# EAGLE board in4_mount (EAGLE 7.5.0)
CIRCULAR-LAYOUT-SETTINGS: 0.650000 0.700000 0.552268 8.000000 0 0 0
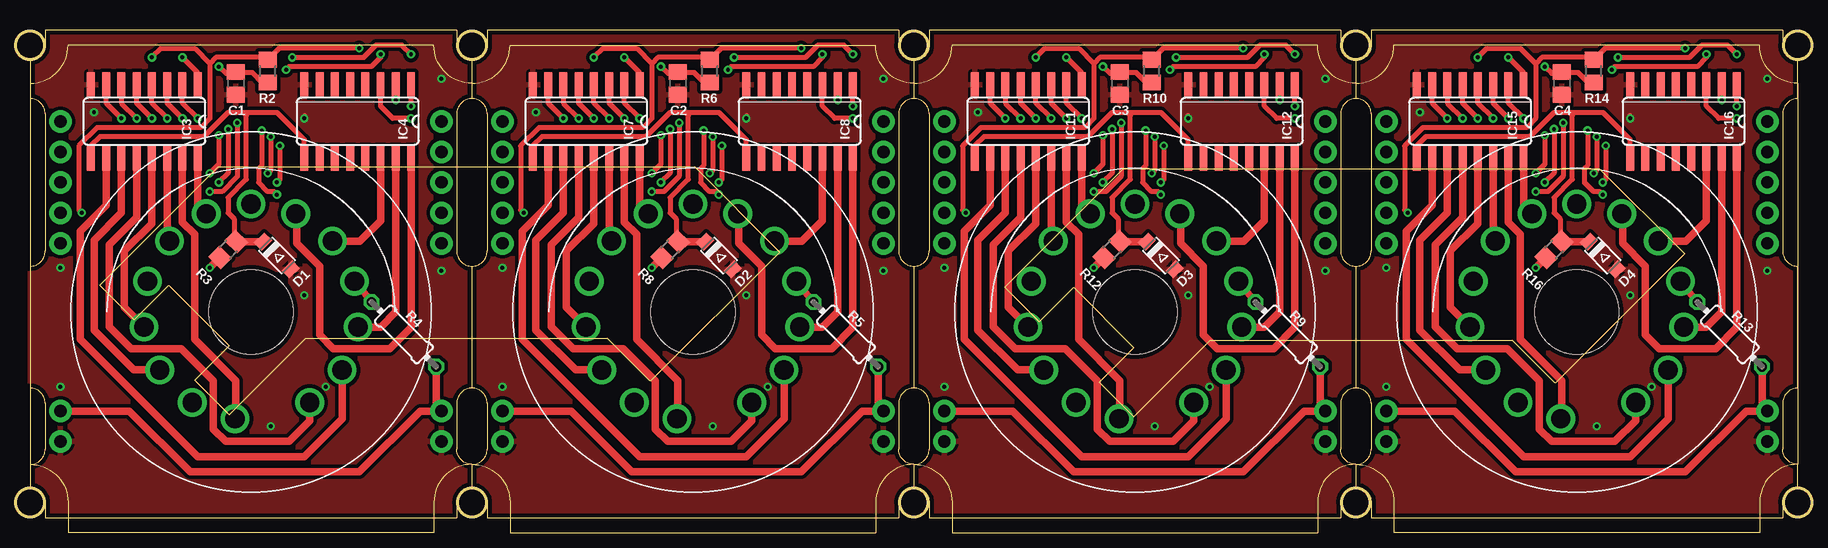
[diagram p0: board, top side]
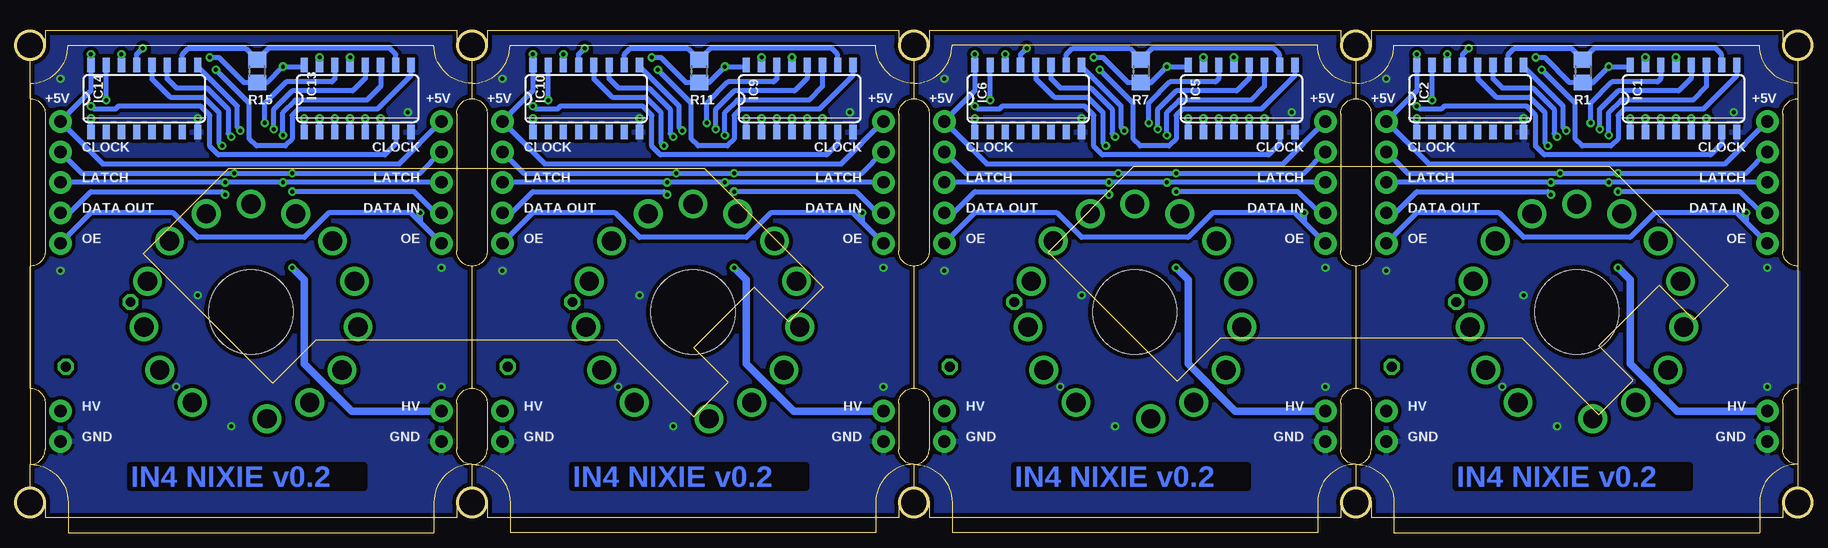
[diagram p1: board, bottom side, seen from below]

Size 147.32 x 40.64 mm. Coordinates in mm from the lower left corner, seen from the top.
Outline: 36.83,2.54 arc90 35.56,1.27 35.56,0 1.27,0 1.27,1.27 arc90 0,2.54 0,4.45 arc90 1.27,5.71 1.27,9.52 arc90 0,10.8
Outline: 36.83,38.1 arc-90 35.56,39.37 35.56,40.64 1.27,40.64 1.27,39.37 arc-90 0,38.1 0,34.92 arc-90 1.27,33.66 1.27,22.23 arc-90 0,20.95
Outline: 36.83,20.95 arc-90 35.56,22.23 35.56,33.66 arc-90 36.83,34.92
Outline: 36.83,4.45 arc-90 35.56,5.71 35.56,9.52 arc-90 36.83,10.8
Outline: 36.83,38.1 36.83,34.92
Outline: 36.83,20.95 36.83,10.8
Outline: 36.83,4.45 36.83,2.54
Outline: 73.66,2.54 arc90 72.39,1.27 72.39,0 38.1,0 38.1,1.27 arc90 36.83,2.54
Outline: 73.66,38.1 arc-90 72.39,39.37 72.39,40.64 38.1,40.64 38.1,39.37 arc-90 36.83,38.1
Outline: 36.83,20.95 arc90 38.1,22.23 38.1,33.66 arc90 36.83,34.92
Outline: 73.66,20.95 arc-90 72.39,22.23 72.39,33.66 arc-90 73.66,34.92
Outline: 36.83,4.45 arc90 38.1,5.71 38.1,9.52 arc90 36.83,10.8
Outline: 73.66,4.45 arc-90 72.39,5.71 72.39,9.52 arc-90 73.66,10.8
Outline: 73.66,38.1 73.66,34.92
Outline: 73.66,20.95 73.66,10.8
Outline: 73.66,4.45 73.66,2.54
Outline: 110.49,2.54 arc90 109.22,1.27 109.22,0 74.93,0 74.93,1.27 arc90 73.66,2.54
Outline: 110.49,38.1 arc-90 109.22,39.37 109.22,40.64 74.93,40.64 74.93,39.37 arc-90 73.66,38.1
Outline: 73.66,20.95 arc90 74.93,22.23 74.93,33.66 arc90 73.66,34.92
Outline: 110.49,20.95 arc-90 109.22,22.23 109.22,33.66 arc-90 110.49,34.92
Outline: 73.66,4.45 arc90 74.93,5.71 74.93,9.52 arc90 73.66,10.8
Outline: 110.49,4.45 arc-90 109.22,5.71 109.22,9.52 arc-90 110.49,10.8
Outline: 110.49,38.1 110.49,34.92
Outline: 110.49,20.95 110.49,10.8
Outline: 110.49,4.45 110.49,2.54
Outline: 110.49,2.54 arc-90 111.76,1.27 111.76,0 146.05,0 146.05,1.27 arc-90 147.32,2.54 147.32,4.45 arc-90 146.05,5.71 146.05,9.52 arc-90 147.32,10.8 147.32,20.95 arc-90 146.05,22.23 146.05,33.66 arc-90 147.32,34.92 147.32,38.1 arc-90 146.05,39.37 146.05,40.64 111.76,40.64 111.76,39.37 arc-90 110.49,38.1
Outline: 110.49,20.95 arc90 111.76,22.23 111.76,33.66 arc90 110.49,34.92
Outline: 110.49,4.45 arc90 111.76,5.71 111.76,9.52 arc90 110.49,10.8
Copper layers (1*16): Top 0.0356mm / dielectric 1.5288mm / Bottom 0.0356mm
Design rules "OSHPARK_mod *": minimum track width 6mil, minimum drill 13mil, track to track 6mil, track to pad 6mil, pad to pad 6mil, via to via 6mil, smd to smd 0mil, copper to edge 15mil, drill to drill 6mil, minimum pad ring 10mil, minimum via ring 7mil, stop-mask expansion 3mil, vias tented up to drill 20mil, thermal gap 10mil
Milling: area 35.7,38.2 to 38,40.5; area -1.2,0.1 to 1.2,2.4; area 72.5,38.2 to 74.8,40.5; area 109.3,38.2 to 111.7,40.5; area 146.2,38.2 to 148.5,40.5; area -1.2,38.2 to 1.2,40.5; area 35.7,0.1 to 38,2.4; area 72.5,0.1 to 74.8,2.4; area 109.3,0.1 to 111.7,2.4; area 146.2,0.1 to 148.5,2.4; 78 lines

## Footprints (pad centres in the part's own frame; a part is rotated, then mirrored left to right if it is on the bottom)
C0805 = smd 1.3 x 1.5: 1 -0.95,0; 2 0.95,0
SOD-123 = smd 0.91 x 1.22: A 1.635,0; C -1.635,0
SO16 = smd 0.6 x 1.2: 1 -4.445,-2.8; 2 -3.175,-2.8; 3 -1.905,-2.8; 4 -0.635,-2.8; 5 0.635,-2.8; 6 1.905,-2.8; 7 3.175,-2.8; 8 4.445,-2.8; 9 4.445,2.8; 10 3.175,2.8; 11 1.905,2.8; 12 0.635,2.8; 13 -0.635,2.8; 14 -1.905,2.8; 15 -3.175,2.8; 16 -4.445,2.8
SO16' = smd 0.66 x 2.032: 1 -4.445,-3.073; 2 -3.175,-3.073; 3 -1.905,-3.073; 4 -0.635,-3.073; 5 0.635,-3.073; 6 1.905,-3.073; 7 3.175,-3.073; 8 4.445,-3.073; 9 4.445,3.073; 10 3.175,3.073; 11 1.905,3.073; 12 0.635,3.073; 13 -0.635,3.073; 14 -1.905,3.073; 15 -3.175,3.073; 16 -4.445,3.073
1X05_NO_SILK = drill 1.016 pad 1.88: 1 0,0; 2 2.54,0; 3 5.08,0; 4 7.62,0; 5 10.16,0
1X02_NO_SILK = drill 1.016 pad 1.88: 1 0,0; 2 2.54,0
IN-4 = drill 1.6: 1 4.902,-7.548; 2 7.59,-4.836; 3 8.912,-1.253; 4 8.629,2.556; 5 6.792,5.904; 6 3.732,8.19; 7 0,9; 8 -3.732,8.19; 9 -6.792,5.904; 10 -8.629,2.556; 11 -8.912,-1.253; 12 -7.59,-4.836; 13 -4.902,-7.548; 14 -1.33,-8.901 | hole 7: 0,0
R0805 = smd 1.3 x 1.5: 1 -0.95,0; 2 0.95,0
0204/7 = drill 0.813 octagon: 1 -3.81,0; 2 3.81,0

## Placement (x,y rotation side)
C1  [C0805]  17.14,36.2 270 top
C2  [C0805]  53.98,36.2 270 top
C3  [C0805]  90.81,36.2 270 top
C4  [C0805]  127.63,36.2 270 top
D1  [SOD-123]  20.57,21.84 315 top
D2  [SOD-123]  57.4,21.84 315 top
D3  [SOD-123]  94.23,21.84 315 top
D4  [SOD-123]  131.06,21.84 315 top
IC1  74HC595D  [SO16]  9.52,34.92 0 bottom
IC2  74HC595D  [SO16]  27.31,34.92 0 bottom
IC3  ULN2003AD  [SO16']  9.52,33.02 180 top
IC4  ULN2003AD  [SO16']  27.31,33.02 180 top
IC5  74HC595D  [SO16]  46.36,34.92 0 bottom
IC6  74HC595D  [SO16]  64.14,34.92 0 bottom
IC7  ULN2003AD  [SO16']  46.36,33.02 180 top
IC8  ULN2003AD  [SO16']  64.14,33.02 180 top
IC9  74HC595D  [SO16]  83.19,34.92 0 bottom
IC10  74HC595D  [SO16]  100.97,34.92 0 bottom
IC11  ULN2003AD  [SO16']  83.19,33.02 180 top
IC12  ULN2003AD  [SO16']  100.97,33.02 180 top
IC13  74HC595D  [SO16]  120.02,34.92 0 bottom
IC14  74HC595D  [SO16]  137.8,34.92 0 bottom
IC15  ULN2003AD  [SO16']  120.02,33.02 180 top
IC16  ULN2003AD  [SO16']  137.8,33.02 180 top
JP1  [1X05_NO_SILK]  2.54,33.02 270 top
JP2  [1X02_NO_SILK]  2.54,6.35 90 top
JP3  [1X05_NO_SILK]  34.29,33.02 270 top
JP4  [1X02_NO_SILK]  34.29,6.35 90 top
JP5  [1X05_NO_SILK]  39.37,33.02 270 top
JP6  [1X05_NO_SILK]  71.12,33.02 270 top
JP7  [1X02_NO_SILK]  39.37,6.35 90 top
JP8  [1X02_NO_SILK]  71.12,6.35 90 top
JP9  [1X05_NO_SILK]  76.2,33.02 270 top
JP10  [1X05_NO_SILK]  107.95,33.02 270 top
JP11  [1X02_NO_SILK]  76.2,6.35 90 top
JP12  [1X02_NO_SILK]  107.95,6.35 90 top
JP13  [1X05_NO_SILK]  113.03,33.02 270 top
JP14  [1X05_NO_SILK]  144.78,33.02 270 top
JP15  [1X02_NO_SILK]  113.03,6.35 90 top
JP16  [1X02_NO_SILK]  144.78,6.35 90 top
N1  IN-4  [IN-4]  18.41,17.14 0 top
N2  IN-4  [IN-4]  55.25,17.14 0 top
N3  IN-4  [IN-4]  92.08,17.14 0 top
N4  IN-4  [IN-4]  128.91,17.14 0 top
R1  [R0805]  17.91,37.21 270 bottom
R2  [R0805]  19.81,37.21 90 top
R3  [R0805]  16.51,22.35 45 top
R4  [0204/7]  31.15,15.28 315 top
R5  [0204/7]  67.98,15.28 315 top
R6  [R0805]  56.64,37.21 90 top
R7  [R0805]  54.74,37.21 270 bottom
R8  [R0805]  53.34,22.35 45 top
R9  [0204/7]  104.81,15.28 315 top
R10  [R0805]  93.47,37.21 90 top
R11  [R0805]  91.57,37.21 270 bottom
R12  [R0805]  90.17,22.35 45 top
R13  [0204/7]  141.64,15.28 315 top
R14  [R0805]  130.3,37.21 90 top
R15  [R0805]  128.4,37.21 270 bottom
R16  [R0805]  127,22.35 45 top

## Library data of the parts
C1-C4 R1-R3 R6-R8 R10-R12 R14-R16 = rcl
D1-D4 = dp_devices
IC1 IC2 IC5 IC6 IC9 IC10 IC13 IC14 = SparkFun-DigitalIC; PROD_ID: IC-07875
IC3 IC4 IC7 IC8 IC11 IC12 IC15 IC16 = uln-udn
JP1-JP16 = SparkFun-Connectors
N1-N4 = russian-nixies
R4 R5 R9 R13 = resistor

## Nets
+5V: C1.1 IC1.16 IC2.16 JP1.1 JP3.1 R1.2 R2.1
+5V1: C2.1 IC5.16 IC6.16 JP5.1 JP6.1 R6.1 R7.2
+5V2: C3.1 IC9.16 IC10.16 JP9.1 JP10.1 R10.1 R11.2
+5V3: C4.1 IC13.16 IC14.16 JP13.1 JP14.1 R14.1 R15.2
CLAMP_HV: D1.C IC3.9 IC4.9 R3.2
CLAMP_HV1: D2.C IC7.9 IC8.9 R8.2
CLAMP_HV2: D3.C IC11.9 IC12.9 R12.2
CLAMP_HV3: D4.C IC15.9 IC16.9 R16.2
CLEAR: IC1.10 IC2.10 R1.1
CLEAR1: IC5.10 IC6.10 R7.1
CLEAR2: IC9.10 IC10.10 R11.1
CLEAR3: IC13.10 IC14.10 R15.1
CLK: IC1.11 IC2.11 JP1.2 JP3.2
CLK1: IC5.11 IC6.11 JP5.2 JP6.2
CLK2: IC9.11 IC10.11 JP9.2 JP10.2
CLK3: IC13.11 IC14.11 JP13.2 JP14.2
DATA_IN: IC1.14 JP1.4
DATA_IN1: IC5.14 JP5.4
DATA_IN2: IC9.14 JP9.4
DATA_IN3: IC13.14 JP13.4
DATA_OUT: IC2.9 JP3.4
DATA_OUT1: IC6.9 JP6.4
DATA_OUT2: IC10.9 JP10.4
DATA_OUT3: IC14.9 JP14.4
DIG0_HV: IC3.16 N1.8
DIG0_HV1: IC7.16 N2.8
DIG0_HV2: IC11.16 N3.8
DIG0_HV3: IC15.16 N4.8
DIG0_LV: IC1.15 IC3.1
DIG0_LV1: IC5.15 IC7.1
DIG0_LV2: IC9.15 IC11.1
DIG0_LV3: IC13.15 IC15.1
DIG1_HV: IC3.15 N1.14
DIG1_HV1: IC7.15 N2.14
DIG1_HV2: IC11.15 N3.14
DIG1_HV3: IC15.15 N4.14
DIG1_LV: IC1.1 IC3.2
DIG1_LV1: IC5.1 IC7.2
DIG1_LV2: IC9.1 IC11.2
DIG1_LV3: IC13.1 IC15.2
DIG2_HV: IC3.14 N1.9
DIG2_HV1: IC7.14 N2.9
DIG2_HV2: IC11.14 N3.9
DIG2_HV3: IC15.14 N4.9
DIG2_LV: IC1.2 IC3.3
DIG2_LV1: IC5.2 IC7.3
DIG2_LV2: IC9.2 IC11.3
DIG2_LV3: IC13.2 IC15.3
DIG3_HV: IC3.13 N1.11
DIG3_HV1: IC7.13 N2.11
DIG3_HV2: IC11.13 N3.11
DIG3_HV3: IC15.13 N4.11
DIG3_LV: IC1.3 IC3.4
DIG3_LV1: IC5.3 IC7.4
DIG3_LV2: IC9.3 IC11.4
DIG3_LV3: IC13.3 IC15.4
DIG4_HV: IC3.12 N1.1
DIG4_HV1: IC7.12 N2.1
DIG4_HV2: IC11.12 N3.1
DIG4_HV3: IC15.12 N4.1
DIG4_LV: IC1.4 IC3.5
DIG4_LV1: IC5.4 IC7.5
DIG4_LV2: IC9.4 IC11.5
DIG4_LV3: IC13.4 IC15.5
DIG5_HV: IC3.11 N1.12
DIG5_HV1: IC7.11 N2.12
DIG5_HV2: IC11.11 N3.12
DIG5_HV3: IC15.11 N4.12
DIG5_LV: IC1.5 IC3.6
DIG5_LV1: IC5.5 IC7.6
DIG5_LV2: IC9.5 IC11.6
DIG5_LV3: IC13.5 IC15.6
DIG6_HV: IC3.10 N1.2
DIG6_HV1: IC7.10 N2.2
DIG6_HV2: IC11.10 N3.2
DIG6_HV3: IC15.10 N4.2
DIG6_LV: IC1.6 IC3.7
DIG6_LV1: IC5.6 IC7.7
DIG6_LV2: IC9.6 IC11.7
DIG6_LV3: IC13.6 IC15.7
DIG7_HV: IC4.16 N1.6
DIG7_HV1: IC8.16 N2.6
DIG7_HV2: IC12.16 N3.6
DIG7_HV3: IC16.16 N4.6
DIG7_LV: IC1.7 IC4.1
DIG7_LV1: IC5.7 IC8.1
DIG7_LV2: IC9.7 IC12.1
DIG7_LV3: IC13.7 IC16.1
DIG8_HV: IC4.15 N1.3
DIG8_HV1: IC8.15 N2.3
DIG8_HV2: IC12.15 N3.3
DIG8_HV3: IC16.15 N4.3
DIG8_LV: IC2.15 IC4.2
DIG8_LV1: IC6.15 IC8.2
DIG8_LV2: IC10.15 IC12.2
DIG8_LV3: IC14.15 IC16.2
DIG9_HV: IC4.14 N1.5
DIG9_HV1: IC8.14 N2.5
DIG9_HV2: IC12.14 N3.5
DIG9_HV3: IC16.14 N4.5
DIG9_LV: IC2.1 IC4.3
DIG9_LV1: IC6.1 IC8.3
DIG9_LV2: IC10.1 IC12.3
DIG9_LV3: IC14.1 IC16.3
GND: C1.2 D1.A IC1.8 IC2.8 IC3.8 IC4.8 JP2.1 JP4.1
GND1: C2.2 D2.A IC5.8 IC6.8 IC7.8 IC8.8 JP7.1 JP8.1
GND2: C3.2 D3.A IC9.8 IC10.8 IC11.8 IC12.8 JP11.1 JP12.1
GND3: C4.2 D4.A IC13.8 IC14.8 IC15.8 IC16.8 JP15.1 JP16.1
HV_IN: JP2.2 JP4.2 R3.1 R4.2
HV_IN1: JP7.2 JP8.2 R5.2 R8.1
HV_IN2: JP11.2 JP12.2 R9.2 R12.1
HV_IN3: JP15.2 JP16.2 R13.2 R16.1
LATCH: IC1.12 IC2.12 JP1.3 JP3.3
LATCH1: IC5.12 IC6.12 JP5.3 JP6.3
LATCH2: IC9.12 IC10.12 JP9.3 JP10.3
LATCH3: IC13.12 IC14.12 JP13.3 JP14.3
N$1: IC1.9 IC2.14
N$2: IC4.4
N$3: IC4.7
N$4: IC4.6
N$5: IC4.5
N$6: N2.4 R5.1
N$7: IC5.9 IC6.14
N$8: IC8.4
N$9: IC8.7
N$10: IC8.6
N$11: N1.4 R4.1
N$12: IC8.5
N$13: N3.4 R9.1
N$14: IC9.9 IC10.14
N$15: IC12.4
N$16: IC12.7
N$17: IC12.6
N$18: IC12.5
N$19: N4.4 R13.1
N$20: IC13.9 IC14.14
N$21: IC16.4
N$22: IC16.7
N$23: IC16.6
N$24: IC16.5
OE: IC1.13 IC2.13 JP1.5 JP3.5 R2.2
OE1: IC5.13 IC6.13 JP5.5 JP6.5 R6.2
OE2: IC9.13 IC10.13 JP9.5 JP10.5 R10.2
OE3: IC13.13 IC14.13 JP13.5 JP14.5 R14.2

## Tracks (layer width: path | path; a pad name or v marks a point on that pad's centre or on a via)
+5V  (via drill 0.33)
  Top 0.406: v15.75,37.59 16.32,37.02 C1.1 17.21,37.08 18.54,37.08 19.36,36.26 R2.1 | v21.84,38.35 27.81,38.35 28.83,39.37 30.99,39.37 v31.75,38.61
  Bottom 0.406: JP1.1 6.1,29.46 30.73,29.46 JP3.1 31.75,35.56 IC2.16 v31.75,38.61 | IC1.16 14.1,37.59 v15.75,37.59 17.08,36.26 R1.2 18.99,36.26 21.08,38.35 v21.84,38.35
+5V1  (via drill 0.33)
  Top 0.406: v52.58,37.59 53.15,37.02 C2.1 54.04,37.08 55.37,37.08 56.2,36.26 R6.1 | v58.67,38.35 64.64,38.35 65.66,39.37 67.82,39.37 v68.58,38.61
  Bottom 0.406: JP5.1 42.93,29.46 67.56,29.46 JP6.1 68.58,35.56 IC6.16 v68.58,38.61 | IC5.16 50.93,37.59 v52.58,37.59 53.91,36.26 R7.2 55.82,36.26 57.91,38.35 v58.67,38.35
+5V2  (via drill 0.33)
  Top 0.406: v89.41,37.59 89.98,37.02 C3.1 90.87,37.08 92.2,37.08 93.03,36.26 R10.1 | v95.5,38.35 101.47,38.35 102.49,39.37 104.65,39.37 v105.41,38.61
  Bottom 0.406: JP9.1 79.76,29.46 104.39,29.46 JP10.1 105.41,35.56 IC10.16 v105.41,38.61 | IC9.16 87.76,37.59 v89.41,37.59 90.74,36.26 R11.2 92.65,36.26 94.74,38.35 v95.5,38.35
+5V3  (via drill 0.33)
  Top 0.406: v126.24,37.59 126.81,37.02 C4.1 127.7,37.08 129.03,37.08 129.85,36.26 R14.1 | v132.33,38.35 138.3,38.35 139.32,39.37 141.48,39.37 v142.24,38.61
  Bottom 0.406: JP13.1 116.59,29.46 141.22,29.46 JP14.1 142.24,35.56 IC14.16 v142.24,38.61 | IC13.16 124.59,37.59 v126.24,37.59 127.57,36.26 R15.2 129.48,36.26 131.57,38.35 v132.33,38.35
CLAMP_HV
  Top 0.406: IC4.9 22.86,31.5 20.57,33.78 17.78,33.78 | IC3.9 5.08,30.99 5.84,31.75 14.48,31.75 16.51,33.78 17.78,33.78 | 17.78,33.78 18.03,33.53 18.03,28.19 16.51,26.67 16.51,25.4 17.02,24.89 17.02,23.19 R3.2
  Top 0.61: D1.C 17.2,23 R3.2
CLAMP_HV1
  Top 0.406: IC8.9 59.69,31.5 57.4,33.78 54.61,33.78 | IC7.9 41.91,30.99 42.67,31.75 51.31,31.75 53.34,33.78 54.61,33.78 | 54.61,33.78 54.86,33.53 54.86,28.19 53.34,26.67 53.34,25.4 53.85,24.89 53.85,23.19 R8.2
  Top 0.61: D2.C 54.03,23 R8.2
CLAMP_HV2
  Top 0.406: IC12.9 96.52,31.5 94.23,33.78 91.44,33.78 | IC11.9 78.74,30.99 79.5,31.75 88.14,31.75 90.17,33.78 91.44,33.78 | 91.44,33.78 91.69,33.53 91.69,28.19 90.17,26.67 90.17,25.4 90.68,24.89 90.68,23.19 R12.2
  Top 0.61: D3.C 90.87,23 R12.2
CLAMP_HV3
  Top 0.406: IC16.9 133.35,31.5 131.06,33.78 128.27,33.78 | IC15.9 115.57,30.99 116.33,31.75 124.97,31.75 127,33.78 128.27,33.78 | 128.27,33.78 128.52,33.53 128.52,28.19 127,26.67 127,25.4 127.51,24.89 127.51,23.19 R16.2
  Top 0.61: D4.C 127.69,23 R16.2
CLEAR
  Bottom 0.406: IC2.10 24.13,38.61 23.62,39.12 18.86,39.12 R1.1 16.95,39.12 6.86,39.12 6.35,38.61 IC1.10
CLEAR1
  Bottom 0.406: IC6.10 60.96,38.61 60.45,39.12 55.69,39.12 R7.1 53.78,39.12 43.69,39.12 43.18,38.61 IC5.10
CLEAR2
  Bottom 0.406: IC10.10 97.79,38.61 97.28,39.12 92.52,39.12 R11.1 90.61,39.12 80.52,39.12 80.01,38.61 IC9.10
CLEAR3
  Bottom 0.406: IC14.10 134.62,38.61 134.11,39.12 129.35,39.12 R15.1 127.44,39.12 117.35,39.12 116.84,38.61 IC13.10
CLK  (via drill 0.33)
  Top 0.406: v20.07,31.75 20.07,28.96 v19.81,28.7 | v15.75,31.88 15.75,29.46 v14.99,28.7
  Bottom 0.406: JP3.2 32.51,28.7 v19.81,28.7 v14.99,28.7 4.32,28.7 JP1.2 | v20.07,31.75 20.32,32 20.32,34.04 22.1,35.81 24.64,35.81 25.4,36.58 IC2.11 | IC1.11 7.62,35.93 8.76,34.8 14.73,34.8 15.75,33.78 v15.75,31.88
CLK1  (via drill 0.33)
  Top 0.406: v56.9,31.75 56.9,28.96 v56.64,28.7 | v52.58,31.88 52.58,29.46 v51.82,28.7
  Bottom 0.406: JP6.2 69.34,28.7 v56.64,28.7 v51.82,28.7 41.15,28.7 JP5.2 | v56.9,31.75 57.15,32 57.15,34.04 58.93,35.81 61.47,35.81 62.23,36.58 IC6.11 | IC5.11 44.45,35.93 45.59,34.8 51.56,34.8 52.58,33.78 v52.58,31.88
CLK2  (via drill 0.33)
  Top 0.406: v93.73,31.75 93.73,28.96 v93.47,28.7 | v89.41,31.88 89.41,29.46 v88.65,28.7
  Bottom 0.406: JP10.2 106.17,28.7 v93.47,28.7 v88.65,28.7 77.98,28.7 JP9.2 | v93.73,31.75 93.98,32 93.98,34.04 95.76,35.81 98.3,35.81 99.06,36.58 IC10.11 | IC9.11 81.28,35.93 82.42,34.8 88.39,34.8 89.41,33.78 v89.41,31.88
CLK3  (via drill 0.33)
  Top 0.406: v130.56,31.75 130.56,28.96 v130.3,28.7 | v126.24,31.88 126.24,29.46 v125.48,28.7
  Bottom 0.406: JP14.2 143,28.7 v130.3,28.7 v125.48,28.7 114.81,28.7 JP13.2 | v130.56,31.75 130.81,32 130.81,34.04 132.59,35.81 135.13,35.81 135.89,36.58 IC14.11 | IC13.11 118.11,35.93 119.25,34.8 125.22,34.8 126.24,33.78 v126.24,31.88
DATA_IN  (via drill 0.33)
  Top 0.406: v17.27,32.89 17.27,28.45 16,27.18 v14.99,27.18
  Bottom 0.406: JP1.4 3.05,25.4 4.83,27.18 v14.99,27.18 | IC1.14 11.43,36.58 11.68,36.32 15.49,36.32 17.27,34.54 v17.27,32.89
DATA_IN1  (via drill 0.33)
  Top 0.406: v54.1,32.89 54.1,28.45 52.83,27.18 v51.82,27.18
  Bottom 0.406: JP5.4 39.88,25.4 41.66,27.18 v51.82,27.18 | IC5.14 48.26,36.58 48.51,36.32 52.32,36.32 54.1,34.54 v54.1,32.89
DATA_IN2  (via drill 0.33)
  Top 0.406: v90.93,32.89 90.93,28.45 89.66,27.18 v88.65,27.18
  Bottom 0.406: JP9.4 76.71,25.4 78.49,27.18 v88.65,27.18 | IC9.14 85.09,36.58 85.34,36.32 89.15,36.32 90.93,34.54 v90.93,32.89
DATA_IN3  (via drill 0.33)
  Top 0.406: v127.76,32.89 127.76,28.45 126.49,27.18 v125.48,27.18
  Bottom 0.406: JP13.4 113.54,25.4 115.32,27.18 v125.48,27.18 | IC13.14 121.92,36.58 122.17,36.32 125.98,36.32 127.76,34.54 v127.76,32.89
DATA_OUT  (via drill 0.33)
  Top 0.406: v20.57,26.92 20.32,27.18 19.81,27.18 19.05,27.94 19.05,29.08 19.3,29.34 v19.3,32.26
  Bottom 0.406: 22.86,38.1 IC2.9 22.86,37.59 19.56,34.29 19.56,32.51 v19.3,32.26 | JP3.4 33.53,25.4 31.75,27.18 20.83,27.18 v20.57,26.92
DATA_OUT1  (via drill 0.33)
  Top 0.406: v57.4,26.92 57.15,27.18 56.64,27.18 55.88,27.94 55.88,29.08 56.13,29.34 v56.13,32.26
  Bottom 0.406: 59.69,38.1 IC6.9 59.69,37.59 56.39,34.29 56.39,32.51 v56.13,32.26 | JP6.4 70.36,25.4 68.58,27.18 57.66,27.18 v57.4,26.92
DATA_OUT2  (via drill 0.33)
  Top 0.406: v94.23,26.92 93.98,27.18 93.47,27.18 92.71,27.94 92.71,29.08 92.96,29.34 v92.96,32.26
  Bottom 0.406: 96.52,38.1 IC10.9 96.52,37.59 93.22,34.29 93.22,32.51 v92.96,32.26 | JP10.4 107.19,25.4 105.41,27.18 94.49,27.18 v94.23,26.92
DATA_OUT3  (via drill 0.33)
  Top 0.406: v131.06,26.92 130.81,27.18 130.3,27.18 129.54,27.94 129.54,29.08 129.79,29.34 v129.79,32.26
  Bottom 0.406: 133.35,38.1 IC14.9 133.35,37.59 130.05,34.29 130.05,32.51 v129.79,32.26 | JP14.4 144.02,25.4 142.24,27.18 131.32,27.18 v131.06,26.92
DIG0_HV
  Top 0.61: IC3.16 13.97,26.05 N1.8
DIG0_HV1
  Top 0.61: IC7.16 50.8,26.05 N2.8
DIG0_HV2
  Top 0.61: IC11.16 87.63,26.05 N3.8
DIG0_HV3
  Top 0.61: IC15.16 124.46,26.05 N4.8
DIG0_LV  (via drill 0.33)
  Top 0.406: IC3.1 13.97,37.08 v12.7,38.35
  Bottom 0.406: v12.7,38.35 IC1.15
DIG0_LV1  (via drill 0.33)
  Top 0.406: IC7.1 50.8,37.08 v49.53,38.35
  Bottom 0.406: v49.53,38.35 IC5.15
DIG0_LV2  (via drill 0.33)
  Top 0.406: IC11.1 87.63,37.08 v86.36,38.35
  Bottom 0.406: v86.36,38.35 IC9.15
DIG0_LV3  (via drill 0.33)
  Top 0.406: IC15.1 124.46,37.08 v123.19,38.35
  Bottom 0.406: v123.19,38.35 IC13.15
DIG1_HV
  Top 0.61: N1.14 17.14,8.3 17.14,11.43 13.72,14.86 13.72,23.62 12.7,24.64 IC3.15
DIG1_HV1
  Top 0.61: N2.14 53.98,8.3 53.98,11.43 50.55,14.86 50.55,23.62 49.53,24.64 IC7.15
DIG1_HV2
  Top 0.61: N3.14 90.81,8.3 90.81,11.43 87.38,14.86 87.38,23.62 86.36,24.64 IC11.15
DIG1_HV3
  Top 0.61: N4.14 127.63,8.3 127.63,11.43 124.21,14.86 124.21,23.62 123.19,24.64 IC15.15
DIG1_LV  (via drill 0.33)
  Top 0.406: v13.97,33.27 12.7,34.54 IC3.2
  Bottom 0.406: 13.97,31.75 IC1.1 v13.97,33.27
DIG1_LV1  (via drill 0.33)
  Top 0.406: v50.8,33.27 49.53,34.54 IC7.2
  Bottom 0.406: 50.8,31.75 IC5.1 v50.8,33.27
DIG1_LV2  (via drill 0.33)
  Top 0.406: v87.63,33.27 86.36,34.54 IC11.2
  Bottom 0.406: 87.63,31.75 IC9.1 v87.63,33.27
DIG1_LV3  (via drill 0.33)
  Top 0.406: v124.46,33.27 123.19,34.54 IC15.2
  Bottom 0.406: 124.46,31.75 IC13.1 v124.46,33.27
DIG2_HV
  Top 0.61: IC3.14 11.43,23.24 N1.9
DIG2_HV1
  Top 0.61: IC7.14 48.26,23.24 N2.9
DIG2_HV2
  Top 0.61: IC11.14 85.09,23.24 N3.9
DIG2_HV3
  Top 0.61: IC15.14 121.92,23.24 N4.9
DIG2_LV  (via drill 0.33)
  Top 0.406: v12.7,33.27 11.43,34.54 IC3.3
  Bottom 0.406: IC1.2 v12.7,33.27
DIG2_LV1  (via drill 0.33)
  Top 0.406: v49.53,33.27 48.26,34.54 IC7.3
  Bottom 0.406: IC5.2 v49.53,33.27
DIG2_LV2  (via drill 0.33)
  Top 0.406: v86.36,33.27 85.09,34.54 IC11.3
  Bottom 0.406: IC9.2 v86.36,33.27
DIG2_LV3  (via drill 0.33)
  Top 0.406: v123.19,33.27 121.92,34.54 IC15.3
  Bottom 0.406: IC13.2 v123.19,33.27
DIG3_HV
  Top 0.61: N1.11 7.87,17.52 7.87,22.23 10.16,24.51 IC3.13
DIG3_HV1
  Top 0.61: N2.11 44.7,17.52 44.7,22.23 46.99,24.51 IC7.13
DIG3_HV2
  Top 0.61: N3.11 81.53,17.52 81.53,22.23 83.82,24.51 IC11.13
DIG3_HV3
  Top 0.61: N4.11 118.36,17.52 118.36,22.23 120.65,24.51 IC15.13
DIG3_LV  (via drill 0.33)
  Top 0.406: v11.43,33.27 10.16,34.54 IC3.4
  Bottom 0.406: IC1.3 v11.43,33.27
DIG3_LV1  (via drill 0.33)
  Top 0.406: v48.26,33.27 46.99,34.54 IC7.4
  Bottom 0.406: IC5.3 v48.26,33.27
DIG3_LV2  (via drill 0.33)
  Top 0.406: v85.09,33.27 83.82,34.54 IC11.4
  Bottom 0.406: IC9.3 v85.09,33.27
DIG3_LV3  (via drill 0.33)
  Top 0.406: v121.92,33.27 120.65,34.54 IC15.4
  Bottom 0.406: IC13.3 v121.92,33.27
DIG4_HV
  Top 0.61: N1.1 23.32,8.08 21.59,6.35 16.31,6.35 15.29,7.37 15.29,11.43 12.62,14.1 8.43,14.1 6.6,15.93 6.6,22.73 8.89,25.02 IC3.12
DIG4_HV1
  Top 0.61: N2.1 60.15,8.08 58.42,6.35 53.14,6.35 52.12,7.37 52.12,11.43 49.45,14.1 45.26,14.1 43.43,15.93 43.43,22.73 45.72,25.02 IC7.12
DIG4_HV2
  Top 0.61: N3.1 96.98,8.08 95.25,6.35 89.97,6.35 88.95,7.37 88.95,11.43 86.28,14.1 82.09,14.1 80.26,15.93 80.26,22.73 82.55,25.02 IC11.12
DIG4_HV3
  Top 0.61: N4.1 133.81,8.08 132.08,6.35 126.8,6.35 125.78,7.37 125.78,11.43 123.11,14.1 118.92,14.1 117.09,15.93 117.09,22.73 119.38,25.02 IC15.12
DIG4_LV  (via drill 0.33)
  Top 0.406: v10.16,33.27 8.89,34.54 IC3.5
  Bottom 0.406: IC1.4 v10.16,33.27
DIG4_LV1  (via drill 0.33)
  Top 0.406: v46.99,33.27 45.72,34.54 IC7.5
  Bottom 0.406: IC5.4 v46.99,33.27
DIG4_LV2  (via drill 0.33)
  Top 0.406: v83.82,33.27 82.55,34.54 IC11.5
  Bottom 0.406: IC9.4 v83.82,33.27
DIG4_LV3  (via drill 0.33)
  Top 0.406: v120.65,33.27 119.38,34.54 IC15.5
  Bottom 0.406: IC13.4 v120.65,33.27
DIG5_HV
  Top 0.61: IC3.11 7.62,25.4 5.33,23.11 5.33,15.62 8.65,12.31 N1.12
DIG5_HV1
  Top 0.61: IC7.11 44.45,25.4 42.16,23.11 42.16,15.62 45.48,12.31 N2.12
DIG5_HV2
  Top 0.61: IC11.11 81.28,25.4 78.99,23.11 78.99,15.62 82.31,12.31 N3.12
DIG5_HV3
  Top 0.61: IC15.11 118.11,25.4 115.82,23.11 115.82,15.62 119.14,12.31 N4.12
DIG5_LV  (via drill 0.33)
  Top 0.406: IC3.6 7.62,34.54 v8.89,33.27
  Bottom 0.406: v8.89,33.27 IC1.5
DIG5_LV1  (via drill 0.33)
  Top 0.406: IC7.6 44.45,34.54 v45.72,33.27
  Bottom 0.406: v45.72,33.27 IC5.5
DIG5_LV2  (via drill 0.33)
  Top 0.406: IC11.6 81.28,34.54 v82.55,33.27
  Bottom 0.406: v82.55,33.27 IC9.5
DIG5_LV3  (via drill 0.33)
  Top 0.406: IC15.6 118.11,34.54 v119.38,33.27
  Bottom 0.406: v119.38,33.27 IC13.5
DIG6_HV
  Top 0.61: N1.2 26.04,12.28 26.04,8.25 22.86,5.08 13.97,5.08 4.19,14.86 4.19,23.88 6.35,26.04 IC3.10
DIG6_HV1
  Top 0.61: N2.2 62.87,12.28 62.87,8.25 59.69,5.08 50.8,5.08 41.02,14.86 41.02,23.88 43.18,26.04 IC7.10
DIG6_HV2
  Top 0.61: N3.2 99.7,12.28 99.7,8.25 96.52,5.08 87.63,5.08 77.85,14.86 77.85,23.88 80.01,26.04 IC11.10
DIG6_HV3
  Top 0.61: N4.2 136.53,12.28 136.53,8.25 133.35,5.08 124.46,5.08 114.68,14.86 114.68,23.88 116.84,26.04 IC15.10
DIG6_LV  (via drill 0.33)
  Top 0.406: IC3.7 6.35,34.54 v7.62,33.27
  Bottom 0.406: IC1.6 v7.62,33.27
DIG6_LV1  (via drill 0.33)
  Top 0.406: IC7.7 43.18,34.54 v44.45,33.27
  Bottom 0.406: IC5.6 v44.45,33.27
DIG6_LV2  (via drill 0.33)
  Top 0.406: IC11.7 80.01,34.54 v81.28,33.27
  Bottom 0.406: IC9.6 v81.28,33.27
DIG6_LV3  (via drill 0.33)
  Top 0.406: IC15.7 116.84,34.54 v118.11,33.27
  Bottom 0.406: IC13.6 v118.11,33.27
DIG7_HV
  Top 0.61: N1.6 22.22,25.26 22.22,22.86 24.13,20.95 24.13,15.24 25.27,14.1 29.97,14.1 31.75,15.88 IC4.16
DIG7_HV1
  Top 0.61: N2.6 59.06,25.26 59.06,22.86 60.96,20.95 60.96,15.24 62.1,14.1 66.8,14.1 68.58,15.88 IC8.16
DIG7_HV2
  Top 0.61: N3.6 95.89,25.26 95.89,22.86 97.79,20.95 97.79,15.24 98.93,14.1 103.63,14.1 105.41,15.88 IC12.16
DIG7_HV3
  Top 0.61: N4.6 132.72,25.26 132.72,22.86 134.62,20.95 134.62,15.24 135.76,14.1 140.46,14.1 142.24,15.88 IC16.16
DIG7_LV  (via drill 0.33)
  Top 0.406: v31.75,34.29 IC4.1
  Bottom 0.406: IC1.7 6.35,31.14 7.27,30.23 21.13,30.23 21.84,30.94 21.84,33.53 22.61,34.29 29.46,34.29 29.72,34.04 31.5,34.04 v31.75,34.29
DIG7_LV1  (via drill 0.33)
  Top 0.406: v68.58,34.29 IC8.1
  Bottom 0.406: IC5.7 43.18,31.14 44.1,30.23 57.96,30.23 58.67,30.94 58.67,33.53 59.44,34.29 66.29,34.29 66.55,34.04 68.33,34.04 v68.58,34.29
DIG7_LV2  (via drill 0.33)
  Top 0.406: v105.41,34.29 IC12.1
  Bottom 0.406: IC9.7 80.01,31.14 80.93,30.23 94.79,30.23 95.5,30.94 95.5,33.53 96.27,34.29 103.12,34.29 103.38,34.04 105.16,34.04 v105.41,34.29
DIG7_LV3  (via drill 0.33)
  Top 0.406: v142.24,34.29 IC16.1
  Bottom 0.406: IC13.7 116.84,31.14 117.76,30.23 131.62,30.23 132.33,30.94 132.33,33.53 133.1,34.29 139.95,34.29 140.21,34.04 141.99,34.04 v142.24,34.29
DIG8_HV
  Top 0.61: IC4.15 30.48,17.14 29.21,15.88 27.35,15.88 N1.3
DIG8_HV1
  Top 0.61: IC8.15 67.31,17.14 66.04,15.88 64.17,15.88 N2.3
DIG8_HV2
  Top 0.61: IC12.15 104.14,17.14 102.87,15.88 101.01,15.88 N3.3
DIG8_HV3
  Top 0.61: IC16.15 140.97,17.14 139.7,15.88 137.84,15.88 N4.3
DIG8_LV  (via drill 0.33)
  Top 0.406: IC4.2 v30.48,34.8
  Bottom 0.406: v30.48,34.8 IC2.15
DIG8_LV1  (via drill 0.33)
  Top 0.406: IC8.2 v67.31,34.8
  Bottom 0.406: v67.31,34.8 IC6.15
DIG8_LV2  (via drill 0.33)
  Top 0.406: IC12.2 v104.14,34.8
  Bottom 0.406: v104.14,34.8 IC10.15
DIG8_LV3  (via drill 0.33)
  Top 0.406: IC16.2 v140.97,34.8
  Bottom 0.406: v140.97,34.8 IC14.15
DIG9_HV
  Top 0.61: IC4.14 29.21,24.77 27.49,23.05 N1.5
DIG9_HV1
  Top 0.61: IC8.14 66.04,24.77 64.32,23.05 N2.5
DIG9_HV2
  Top 0.61: IC12.14 102.87,24.77 101.15,23.05 N3.5
DIG9_HV3
  Top 0.61: IC16.14 139.7,24.77 137.98,23.05 N4.5
DIG9_LV  (via drill 0.33)
  Top 0.406: IC4.3 29.21,34.29 30.23,33.27 v31.75,33.27
  Bottom 0.406: IC2.1 v31.75,33.27
DIG9_LV1  (via drill 0.33)
  Top 0.406: IC8.3 66.04,34.29 67.06,33.27 v68.58,33.27
  Bottom 0.406: IC6.1 v68.58,33.27
DIG9_LV2  (via drill 0.33)
  Top 0.406: IC12.3 102.87,34.29 103.89,33.27 v105.41,33.27
  Bottom 0.406: IC10.1 v105.41,33.27
DIG9_LV3  (via drill 0.33)
  Top 0.406: IC16.3 139.7,34.29 140.72,33.27 v142.24,33.27
  Bottom 0.406: IC14.1 v142.24,33.27
GND  (via drill 0.33)
  Top 0.406: v22.86,33.27 22.86,33.53
  Bottom 0.406: IC2.8 v22.86,33.27
  other vias: 5.33,33.78 34.29,20.57 22.86,18.54 2.54,20.83 2.54,10.92 20.07,7.62 24.64,10.92 34.29,36.58
  pour Top (isolate 0.305, rank 6): 0,40.64 36.83,40.64 36.83,0 0,0
  pour Bottom (isolate 0.305): 0,40.64 36.83,40.64 36.83,0 0,0
GND1  (via drill 0.33)
  Top 0.406: v59.69,33.27 59.69,33.53
  Bottom 0.406: IC6.8 v59.69,33.27
  other vias: 42.16,33.78 71.12,20.57 59.69,18.54 39.37,20.83 39.37,10.92 56.9,7.62 61.47,10.92 71.12,36.58
  pour Top (isolate 0.305, rank 6): 36.83,40.64 73.66,40.64 73.66,0 36.83,0
  pour Bottom (isolate 0.305): 36.83,40.64 73.66,40.64 73.66,0 36.83,0
GND2  (via drill 0.33)
  Top 0.406: v96.52,33.27 96.52,33.53
  Bottom 0.406: IC10.8 v96.52,33.27
  other vias: 78.99,33.78 107.95,20.57 96.52,18.54 76.2,20.83 76.2,10.92 93.73,7.62 98.3,10.92 107.95,36.58
  pour Top (isolate 0.305, rank 6): 73.66,40.64 110.49,40.64 110.49,0 73.66,0
  pour Bottom (isolate 0.305): 73.66,40.64 110.49,40.64 110.49,0 73.66,0
GND3  (via drill 0.33)
  Top 0.406: v133.35,33.27 133.35,33.53
  Bottom 0.406: IC14.8 v133.35,33.27
  other vias: 115.82,33.78 144.78,20.57 133.35,18.54 113.03,20.83 113.03,10.92 130.56,7.62 135.13,10.92 144.78,36.58
  pour Top (isolate 0.305, rank 6): 110.49,40.64 147.32,40.64 147.32,0 110.49,0
  pour Bottom (isolate 0.305): 110.49,40.64 147.32,40.64 147.32,0 110.49,0
HV_IN  (via drill 0.33)
  Top 0.61: JP2.2 8.25,8.89 13.34,3.81 27.43,3.81 32.51,8.89 JP4.2 33.85,9.33 R4.2 | R3.1 v14.99,20.83
  Bottom 0.61: JP2.2 10.03,8.89 13.97,12.83 13.97,19.81 v14.99,20.83
HV_IN1  (via drill 0.33)
  Top 0.61: JP7.2 45.08,8.89 50.17,3.81 64.26,3.81 69.34,8.89 JP8.2 70.68,9.33 R5.2 | R8.1 v51.82,20.83
  Bottom 0.61: JP7.2 46.86,8.89 50.8,12.83 50.8,19.81 v51.82,20.83
HV_IN2  (via drill 0.33)
  Top 0.61: JP11.2 81.92,8.89 87,3.81 101.09,3.81 106.17,8.89 JP12.2 107.51,9.33 R9.2 | R12.1 v88.65,20.83
  Bottom 0.61: JP11.2 83.69,8.89 87.63,12.83 87.63,19.81 v88.65,20.83
HV_IN3  (via drill 0.33)
  Top 0.61: JP15.2 118.75,8.89 123.83,3.81 137.92,3.81 143,8.89 JP16.2 144.34,9.33 R13.2 | R16.1 v125.48,20.83
  Bottom 0.61: JP15.2 120.52,8.89 124.46,12.83 124.46,19.81 v125.48,20.83
LATCH  (via drill 0.33)
  Top 0.406: v20.83,30.99 20.83,28.19 v20.57,27.94 | v16.51,32.38 16.51,28.7 v15.75,27.94
  Bottom 0.406: JP1.3 v15.75,27.94 v20.57,27.94 JP3.3 | IC2.12 26.67,36.58 25.15,35.05 22.35,35.05 21.08,33.78 21.08,31.24 v20.83,30.99 | IC1.12 8.89,36.61 9.94,35.56 14.99,35.56 16.51,34.04 v16.51,32.38
LATCH1  (via drill 0.33)
  Top 0.406: v57.66,30.99 57.66,28.19 v57.4,27.94 | v53.34,32.38 53.34,28.7 v52.58,27.94
  Bottom 0.406: JP5.3 v52.58,27.94 v57.4,27.94 JP6.3 | IC6.12 63.5,36.58 61.98,35.05 59.18,35.05 57.91,33.78 57.91,31.24 v57.66,30.99 | IC5.12 45.72,36.61 46.77,35.56 51.82,35.56 53.34,34.04 v53.34,32.38
LATCH2  (via drill 0.33)
  Top 0.406: v94.49,30.99 94.49,28.19 v94.23,27.94 | v90.17,32.38 90.17,28.7 v89.41,27.94
  Bottom 0.406: JP9.3 v89.41,27.94 v94.23,27.94 JP10.3 | IC10.12 100.33,36.58 98.81,35.05 96.01,35.05 94.74,33.78 94.74,31.24 v94.49,30.99 | IC9.12 82.55,36.61 83.6,35.56 88.65,35.56 90.17,34.04 v90.17,32.38
LATCH3  (via drill 0.33)
  Top 0.406: v131.32,30.99 131.32,28.19 v131.06,27.94 | v127,32.38 127,28.7 v126.24,27.94
  Bottom 0.406: JP13.3 v126.24,27.94 v131.06,27.94 JP14.3 | IC14.12 137.16,36.58 135.64,35.05 132.84,35.05 131.57,33.78 131.57,31.24 v131.32,30.99 | IC13.12 119.38,36.61 120.43,35.56 125.48,35.56 127,34.04 v127,32.38
N$1  (via drill 0.33)
  Top 0.406: v29.21,38.61 29.21,38.35 28.45,37.59 21.59,37.59 v21.34,37.34
  Bottom 0.406: IC1.9 5.08,36.83 7.87,34.04 14.48,34.04 14.99,33.53 14.99,31.56 15.55,30.99 17.97,30.99 18.54,31.56 18.54,34.54 v21.34,37.34 | IC2.14 v29.21,38.61
N$6
  Top 0.61: N2.4 63.87,19.74 R5.1
N$7  (via drill 0.33)
  Top 0.406: v66.04,38.61 66.04,38.35 65.28,37.59 58.42,37.59 v58.17,37.34
  Bottom 0.406: IC5.9 41.91,36.83 44.7,34.04 51.31,34.04 51.82,33.53 51.82,31.56 52.38,30.99 54.8,30.99 55.37,31.56 55.37,34.54 v58.17,37.34 | IC6.14 v66.04,38.61
N$11
  Top 0.61: N1.4 27.04,19.74 R4.1
N$13
  Top 0.61: N3.4 100.7,19.74 R9.1
N$14  (via drill 0.33)
  Top 0.406: v102.87,38.61 102.87,38.35 102.11,37.59 95.25,37.59 v95,37.34
  Bottom 0.406: IC9.9 78.74,36.83 81.53,34.04 88.14,34.04 88.65,33.53 88.65,31.56 89.21,30.99 91.63,30.99 92.2,31.56 92.2,34.54 v95,37.34 | IC10.14 v102.87,38.61
N$19
  Top 0.61: N4.4 137.53,19.74 R13.1
N$20  (via drill 0.33)
  Top 0.406: v139.7,38.61 139.7,38.35 138.94,37.59 132.08,37.59 v131.83,37.34
  Bottom 0.406: IC13.9 115.57,36.83 118.36,34.04 124.97,34.04 125.48,33.53 125.48,31.56 126.04,30.99 128.46,30.99 129.03,31.56 129.03,34.54 v131.83,37.34 | IC14.14 v139.7,38.61
OE  (via drill 0.33)
  Top 0.406: v10.16,38.35 10.92,39.12 13.72,39.12 14.99,37.85 | v27.43,39.12 20.77,39.12 R2.2 19.62,38.35 15.49,38.35 14.99,37.85 | v4.32,25.4 4.06,25.65 4.06,30.99 5.59,32.51 14.22,32.51 14.99,33.27 14.99,37.85
  Bottom 0.406: v27.43,39.12 27.94,38.61 IC2.13 | v10.16,38.35 IC1.13 | JP1.5 4.32,24.64 | 4.32,24.64 5.08,25.4 11.94,25.4 13.97,23.37 22.86,23.37 24.89,25.4 31.75,25.4 JP3.5 | v4.32,25.4 4.32,24.64
OE1  (via drill 0.33)
  Top 0.406: v46.99,38.35 47.75,39.12 50.55,39.12 51.82,37.85 | v64.26,39.12 57.6,39.12 R6.2 56.45,38.35 52.32,38.35 51.82,37.85 | v41.15,25.4 40.89,25.65 40.89,30.99 42.42,32.51 51.05,32.51 51.82,33.27 51.82,37.85
  Bottom 0.406: v64.26,39.12 64.77,38.61 IC6.13 | v46.99,38.35 IC5.13 | JP5.5 41.15,24.64 | 41.15,24.64 41.91,25.4 48.77,25.4 50.8,23.37 59.69,23.37 61.72,25.4 68.58,25.4 JP6.5 | v41.15,25.4 41.15,24.64
OE2  (via drill 0.33)
  Top 0.406: v83.82,38.35 84.58,39.12 87.38,39.12 88.65,37.85 | v101.09,39.12 94.43,39.12 R10.2 93.28,38.35 89.15,38.35 88.65,37.85 | v77.98,25.4 77.72,25.65 77.72,30.99 79.25,32.51 87.88,32.51 88.65,33.27 88.65,37.85
  Bottom 0.406: v101.09,39.12 101.6,38.61 IC10.13 | v83.82,38.35 IC9.13 | JP9.5 77.98,24.64 | 77.98,24.64 78.74,25.4 85.6,25.4 87.63,23.37 96.52,23.37 98.55,25.4 105.41,25.4 JP10.5 | v77.98,25.4 77.98,24.64
OE3  (via drill 0.33)
  Top 0.406: v120.65,38.35 121.41,39.12 124.21,39.12 125.48,37.85 | v137.92,39.12 131.26,39.12 R14.2 130.11,38.35 125.98,38.35 125.48,37.85 | v114.81,25.4 114.55,25.65 114.55,30.99 116.08,32.51 124.71,32.51 125.48,33.27 125.48,37.85
  Bottom 0.406: v137.92,39.12 138.43,38.61 IC14.13 | v120.65,38.35 IC13.13 | JP13.5 114.81,24.64 | 114.81,24.64 115.57,25.4 122.43,25.4 124.46,23.37 133.35,23.37 135.38,25.4 142.24,25.4 JP14.5 | v114.81,25.4 114.81,24.64

## Text on the board
Bottom: IN4 NIXIE v0.2 | IN4 NIXIE v0.2 | IN4 NIXIE v0.2 | IN4 NIXIE v0.2
bPlace: +5V | +5V | +5V | +5V | +5V | +5V | +5V | +5V | CLOCK | CLOCK | CLOCK | CLOCK | CLOCK | CLOCK | CLOCK | CLOCK | LATCH | LATCH | LATCH | LATCH | LATCH | LATCH | LATCH | LATCH | DATA IN | DATA OUT | DATA IN | DATA OUT | DATA IN | DATA OUT | DATA IN | DATA OUT | OE | OE | OE | OE | OE | OE | OE | OE | HV | HV | HV | HV | HV | HV | HV | HV | GND | GND | GND | GND | GND | GND | GND | GND
bStop: IN4 NIXIE v0.2 | IN4 NIXIE v0.2 | IN4 NIXIE v0.2 | IN4 NIXIE v0.2
Milling: Naked NIXIE